# Altium PCB projection_test.PcbDoc
Units mil, origin at the board's own origin, x right, y up, seen from the top; angles counter-clockwise.
Board outline 2305 x 1285.79 mil, 2 copper layers (Top Layer, Bottom Layer); 5 components, 4 nets, 51 pads, 0 vias.
Unrouted connection lines stored in the file: 4.
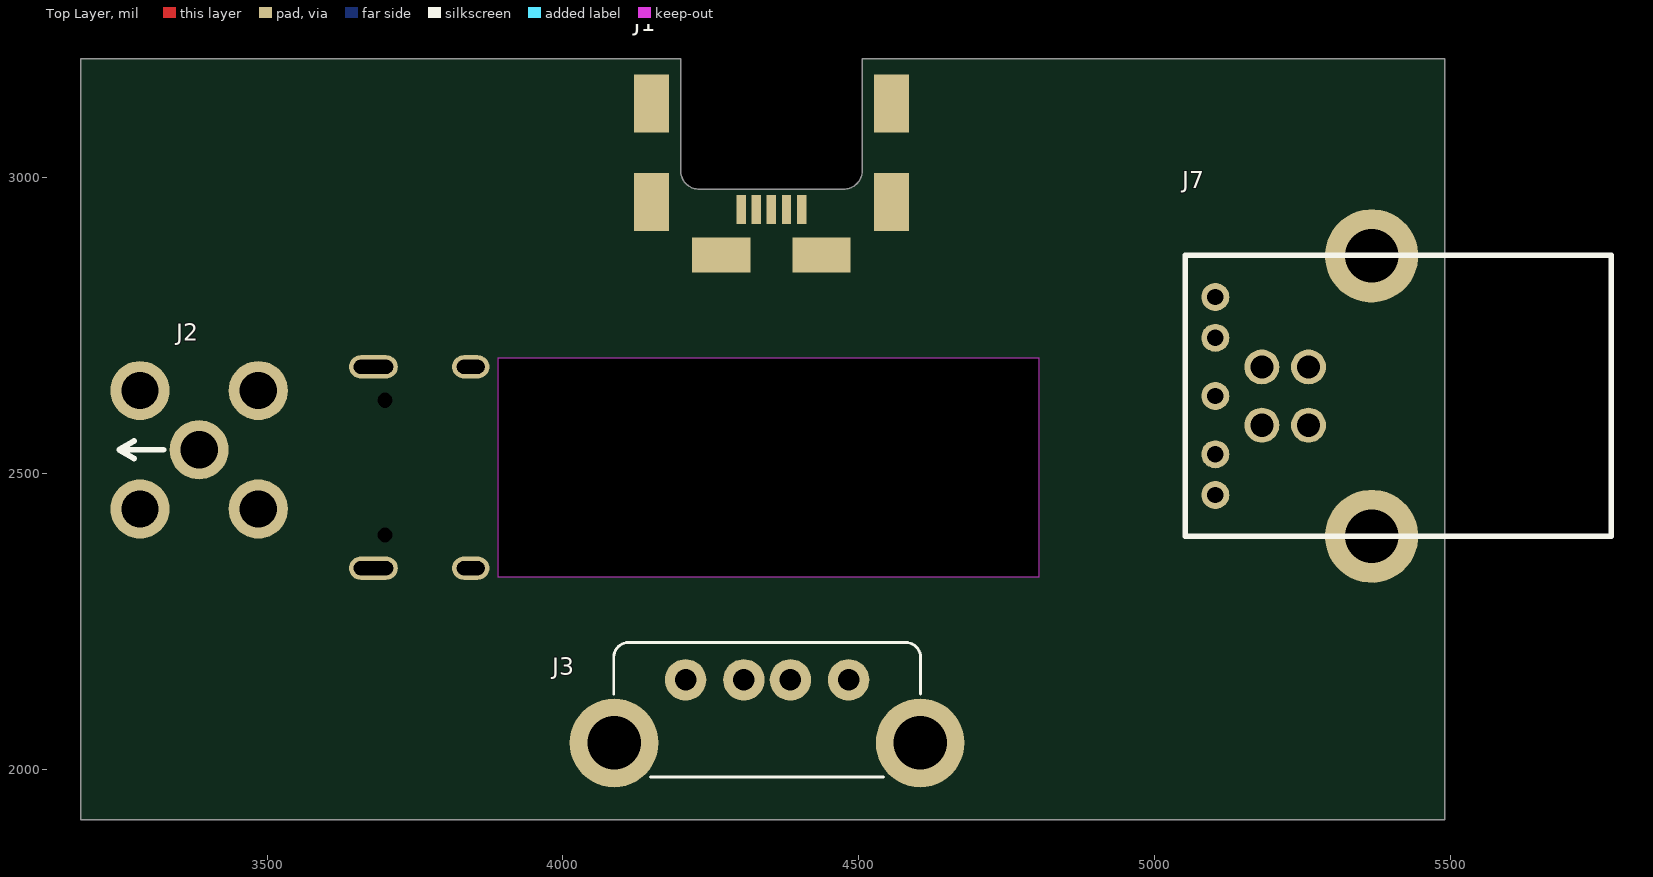
[diagram p0: Top Layer view]
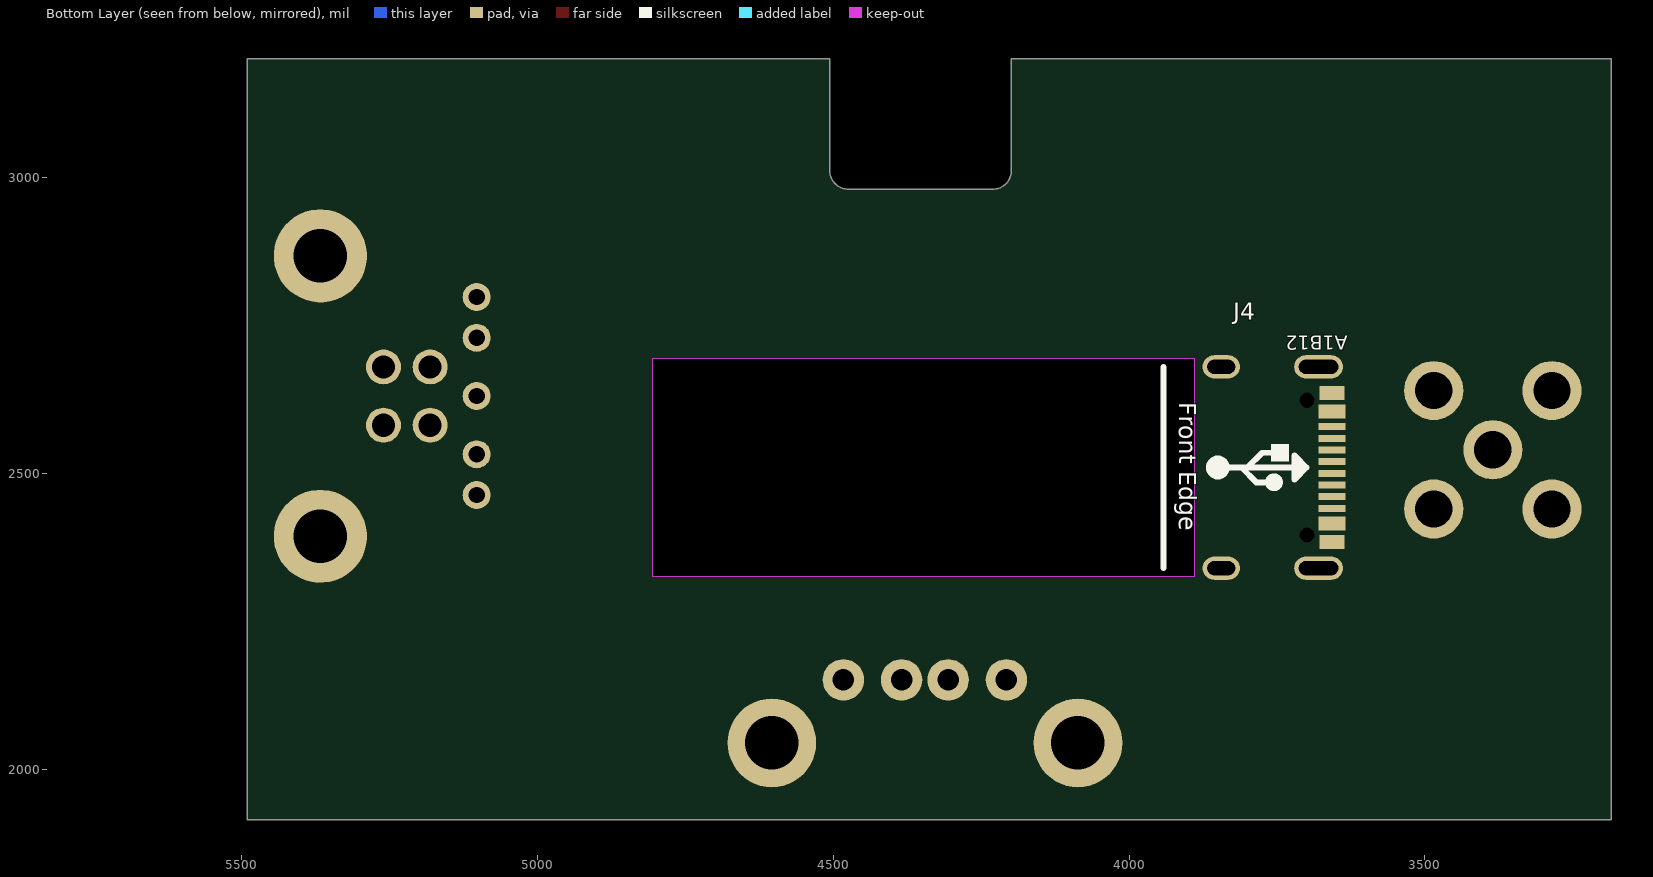
[diagram p1: Bottom Layer view, seen from below]

## Layer stack, top to bottom
Top Solder: solder mask 0.4, Solder Resist, Dk 3.5
Top Layer: signal copper 1.4
Dielectric 1: dielectric 12.6, FR-4, Dk 4.8
Bottom Layer: signal copper 1.4
Bottom Solder: solder mask 0.4, Solder Resist, Dk 3.5

## Board outline
3185,1915 3185,3200.79 4198.7,3200.79 4198.7,3011.81 ccw(c4230.2,3011.81) 4230.2,2980.31 4474.29,2980.31 ccw(c4474.29,3011.81) 4505.79,3011.81 4505.79,3200.79 5490,3200.79 5490,1915
cut-out: 3890,2695 3890,2325 4805,2325 4805,2695

## Design rules (kind name [scope] priority, off if disabled: settings)
Clearance [All] p1: gap=10 ignorepadtopadclearanceinfootprint=FALSE except(0: Arc-Hole Track-Hole SMDPad-Hole THPad-Hole Via-Hole Fill-Hole Poly-Hole Region-Hole Text-Hole)
PolygonConnect [All] p1: connectstyle=Relief reliefconductorwidth=10 reliefentries=4 polygonreliefangle="90 Angle" airgapwidth=10
RoutingVias [All] p1: holewidth=28 width=50 viastyle="Through Hole" minholewidth=28 minwidth=50 maxholewidth=28 maxwidth=50
SolderMaskExpansion [All] p1: expansion=0 istentingtop=FALSE
Width [All] p1: maxlimit=10 minlimit=10 preferedwidth=10
30 further rules are at their usual default settings.

## Components (designator, comment, footprint, x,y, rotation, side; value= is the part's Value field where it differs from the comment)
J1 "0474910001" 0474910001 4352.24,2945.87 r0 top
J2 "SMA-J-P-RA-TH1" SMA-J-P-RA-TH1 3385,2540 r90 top
J3 "1734366-1" 1734366-1 4345,2100 r0 top
J4 "GT-USB-7010C" GT-USB-7010C 3775,2510 r270 bottom
J7 "692221030100" 692221030100 5220.63,2630.79 r90 top

## Footprints (in the part's own frame and the unit in brackets; to place one, negate y for a bottom-side part, rotate by r counter-clockwise, add the part's x,y. Pads: shape width x height; smd on the part's side, far side on the other; paste and mask are expansions set on the pad)
1734366-1 [mm] "CONN RCPT USB2.0 TYPEA 4POS VERT BLACK"
  round 1.778 hole 0.92 mask+0.102: 1(-3.5,1.3) 2(-1,1.3) 3(1,1.3) 4(3.5,1.3)
  round 3.81 hole 2.3: S(-6.57,-1.41) S(6.57,-1.41)
  silkscreen extent -6.58,-2.88 6.58,2.9, body extent -7.9,-3.56 7.9,3.56, height 15.01
0474910001 [mm] "uUSB mid mount"
  rect 0.4x1.25 smd paste-0.075: 1(1.3,0) 2(0.65,0) 3(0,0) 4(-0.65,0) 5(-1.3,0)
  rect 1.5x2.5 smd paste-0.2: M(-5.15,0.33) M(-5.15,4.55) M(5.15,0.33) M(5.15,4.55)
  rect 2.5x1.5 smd paste-0.2: M(-2.155,-1.95) M(2.155,-1.95)
  body extent -5.5,-2.25 5.5,6.88, height 1.48
692221030100 [mm] "USB 3.0 Type B"
  round 1.5 hole 1: 1(1.25,1) 2(-1.25,1) 3(-1.25,-1) 4(1.25,-1)
  round 1.2 hole 0.7: 5(-4.25,3) 6(-2.5,3) 7(0,3) 8(2.5,3) 9(4.25,3)
  round 4 hole 2.3: M1(-6.02,-3.71) M2(6.02,-3.71)
  silkscreen extent -6.02,-14 6.05,4.29, body extent -7.2,-14.01 7.2,4.29, height 12.91
GT-USB-7010C [mm]
  rect 0.6x1.067 smd: A1B12(-3.2,3) B1A12(3.2,3)
  rect 0.6x1.15 smd: A4B9(-2.4,3) B4A9(2.4,3)
  rect 0.3x1.15 smd: A5(-1.25,3) A6(-0.25,3) A7(0.25,3) A8(1.25,3) B5(1.75,3) B6(0.75,3) B7(-0.75,3) B8(-1.75,3)
  rrect100% 1x1.6 hole 0.6 slot 1.2 at 90 deg: SHELL(-4.32,-1.755) SHELL(4.32,-1.755)
  rrect100% 1x2.1 hole 0.6 slot 1.7 at 90 deg: SHELL(-4.32,2.425) SHELL(4.32,2.425)
  rect 0x0 hole 0.65 unplated: SLOT(-2.89,1.925) SLOT(2.89,1.925)
  silkscreen extent -4.32,-4.23 4.32,1.91, body extent -4.47,-4.39 4.47,3.46, height 3.26
SMA-J-P-RA-TH1 [mil] "Samtec SMA Jack Right-Angle Through Hole"
  round 100 hole 63: 1(0,0) 2(-100,-100) 2(-100,100) 2(100,-100) 2(100,100)
  silkscreen extent -15,60 15,135, body extent -138,-138 138,457, height 388

## Part data
J1: "CONN RCPT MICRO USB B 5POS SMD", mfg=Molex, mpn=0474910001, panel_monkey__generated_schlib_path=symbols/0474910001-019dd87a.SchLib, panel_monkey__generated_symbol_ref=0474910001, panel_monkey__part_id=019dd87a-1e57-7a8a-92bd-da6fed6add49, panel_monkey__source_handle=0474910001, panel_monkey__source_symbol_ref=0474910001, panel_monkey__version_id=019dd87a-1e57-74fe-adfa-d5875d5553d4
J2: "CONN SMA JACK R/A 50 OHM PCB", Supplier Part Number 1=C6488932, mfg=Samtec, mpn=SMA-J-P-RA-TH1, panel_monkey__generated_schlib_path=symbols/SMA-J-P-RA-TH1-019dd87a.SchLib, panel_monkey__generated_symbol_ref=SMA-J-P-RA-TH1, panel_monkey__part_id=019dd87a-39de-7efc-aa89-54c41345879b, panel_monkey__source_handle=SMA-J-P-RA-TH1, panel_monkey__source_symbol_ref=SMA-J-P-RA-TH1, panel_monkey__version_id=019dd87a-39de-7228-94cb-6c88eee9c425, Supplier 1=JLCPCB, Supplier Provider Name 1=jlcpcb
J3: "CONN RCPT USB2.0 TYPEA 4POS VERT", mfg="TE Connectivity AMP Connectors", mpn=1734366-1, panel_monkey__generated_schlib_path=symbols/1734366-1-019dd87a.SchLib, panel_monkey__generated_symbol_ref=1734366-1, panel_monkey__part_id=019dd87a-1e83-71b4-bbe4-4e204144c237, panel_monkey__source_handle=1734366-1, panel_monkey__source_symbol_ref=1734366-1, panel_monkey__version_id=019dd87a-1e83-79fc-a6a6-3f77b21c2f7a
J4: "USB-C Right Angle - USB2.0 Pinout", Supplier Part Number 1=C2843967, mfg=G-Switch, mpn=GT-USB-7010C, panel_monkey__generated_schlib_path=symbols/GT-USB-7010C-019dd87a.SchLib, panel_monkey__generated_symbol_ref=GT-USB-7010C, panel_monkey__part_id=019dd87a-3577-74e9-8358-92d0a8817abb, panel_monkey__source_handle=GT-USB-7010C, panel_monkey__source_symbol_ref=GT-USB-7010C, panel_monkey__version_id=019dd87a-3577-7d77-b357-d0310081ab4f, Supplier 1=JLCPCB, Supplier Provider Name 1=jlcpcb
J7: "CONN RCPT USB3.0 TYPEB 9POS R/A", mfg="Würth Elektronik", mpn=692221030100, panel_monkey__generated_schlib_path=symbols/692221030100-019dd87a.SchLib, panel_monkey__generated_symbol_ref=692221030100, panel_monkey__part_id=019dd87a-1eb4-7176-90fa-f6390bc8c3e3, panel_monkey__source_handle=692221030100, panel_monkey__source_symbol_ref=692221030100, panel_monkey__version_id=019dd87a-1eb4-759a-9361-ab0fb20aae16

## Nets (pads, with @x,y where several pads share a name; then routed paths per layer and width w, separated by ;. In a path a pad name is that pad's centre, name@x,y a point inside that pad or via, vN(x,y) a via of type N, cw(c..) or ccw(c..) an arc to the next point about the centre after c; other vN are vias at no path point)
"NetJ4_A1B12, B1A12": J4.A1B12 J4.B1A12
"NetJ4_A4B9, B4A9": J4.A4B9 J4.B4A9
"NetJ4_A6, B6": J4.A6 J4.B6
"NetJ4_A7, B7": J4.A7 J4.B7
pads on no net: J1.1 J1.2 J1.3 J1.4 J1.5 J1.M J2.1 J2.2 J3.1 J3.2 J3.3 J3.4 J3.S J4.A5 J4.A8 J4.B5 J4.B8 J4.SHELL J4.SLOT J7.1 J7.2 J7.3 J7.4 J7.5 J7.6 J7.7 J7.8 J7.9 J7.M1 J7.M2

## Silkscreen, mask and mechanical layers (free items; w line width, h text height)
Mechanical 8:
  lines w10: 4135.71,3200.79 3185,3200.79 3185,1915 5490,1915 5490,3200.79 4568.78,3200.79

## Text inside footprints (layer, text, board x,y; h text height)
J4: Bottom Overlay "Front Edge" at 3925.62,2620 h50 r90; Bottom Overlay "A1B12" at 3630,2740 h40 r180